# EAGLE board SWARMESH (EAGLE 9.2.0)
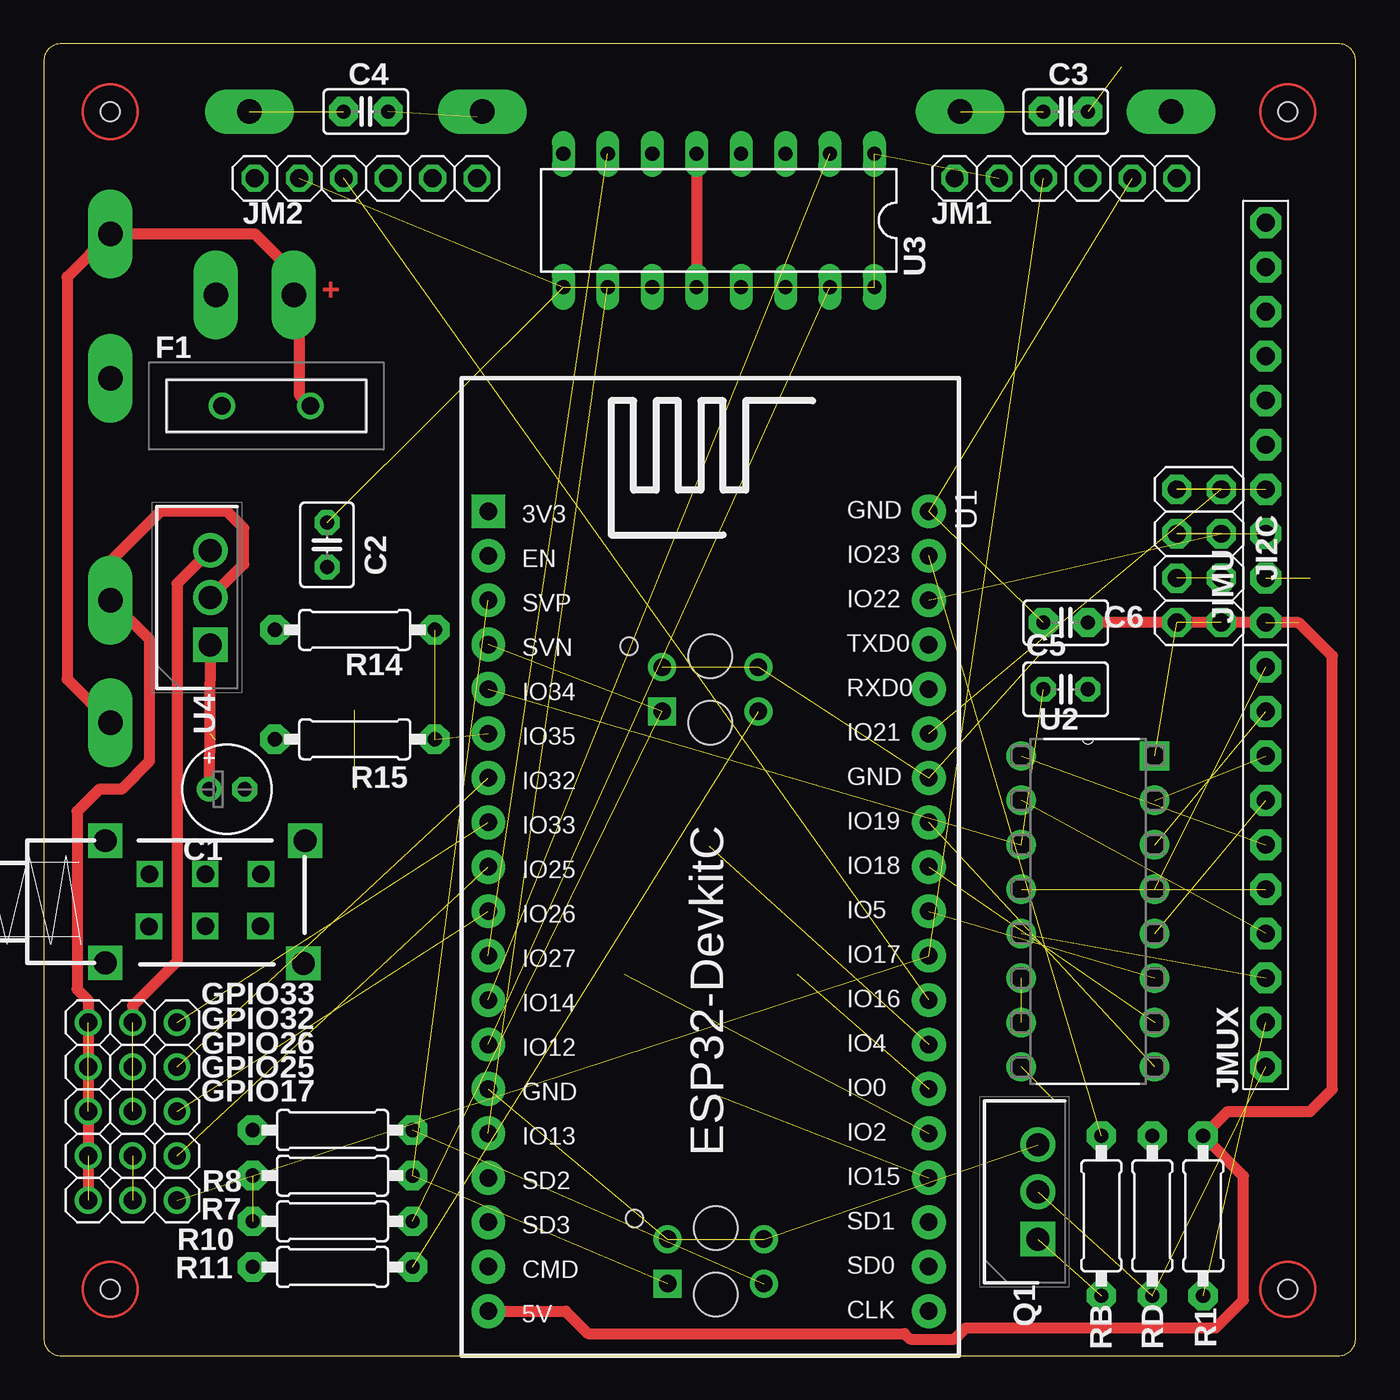
[diagram p0: board, top side]
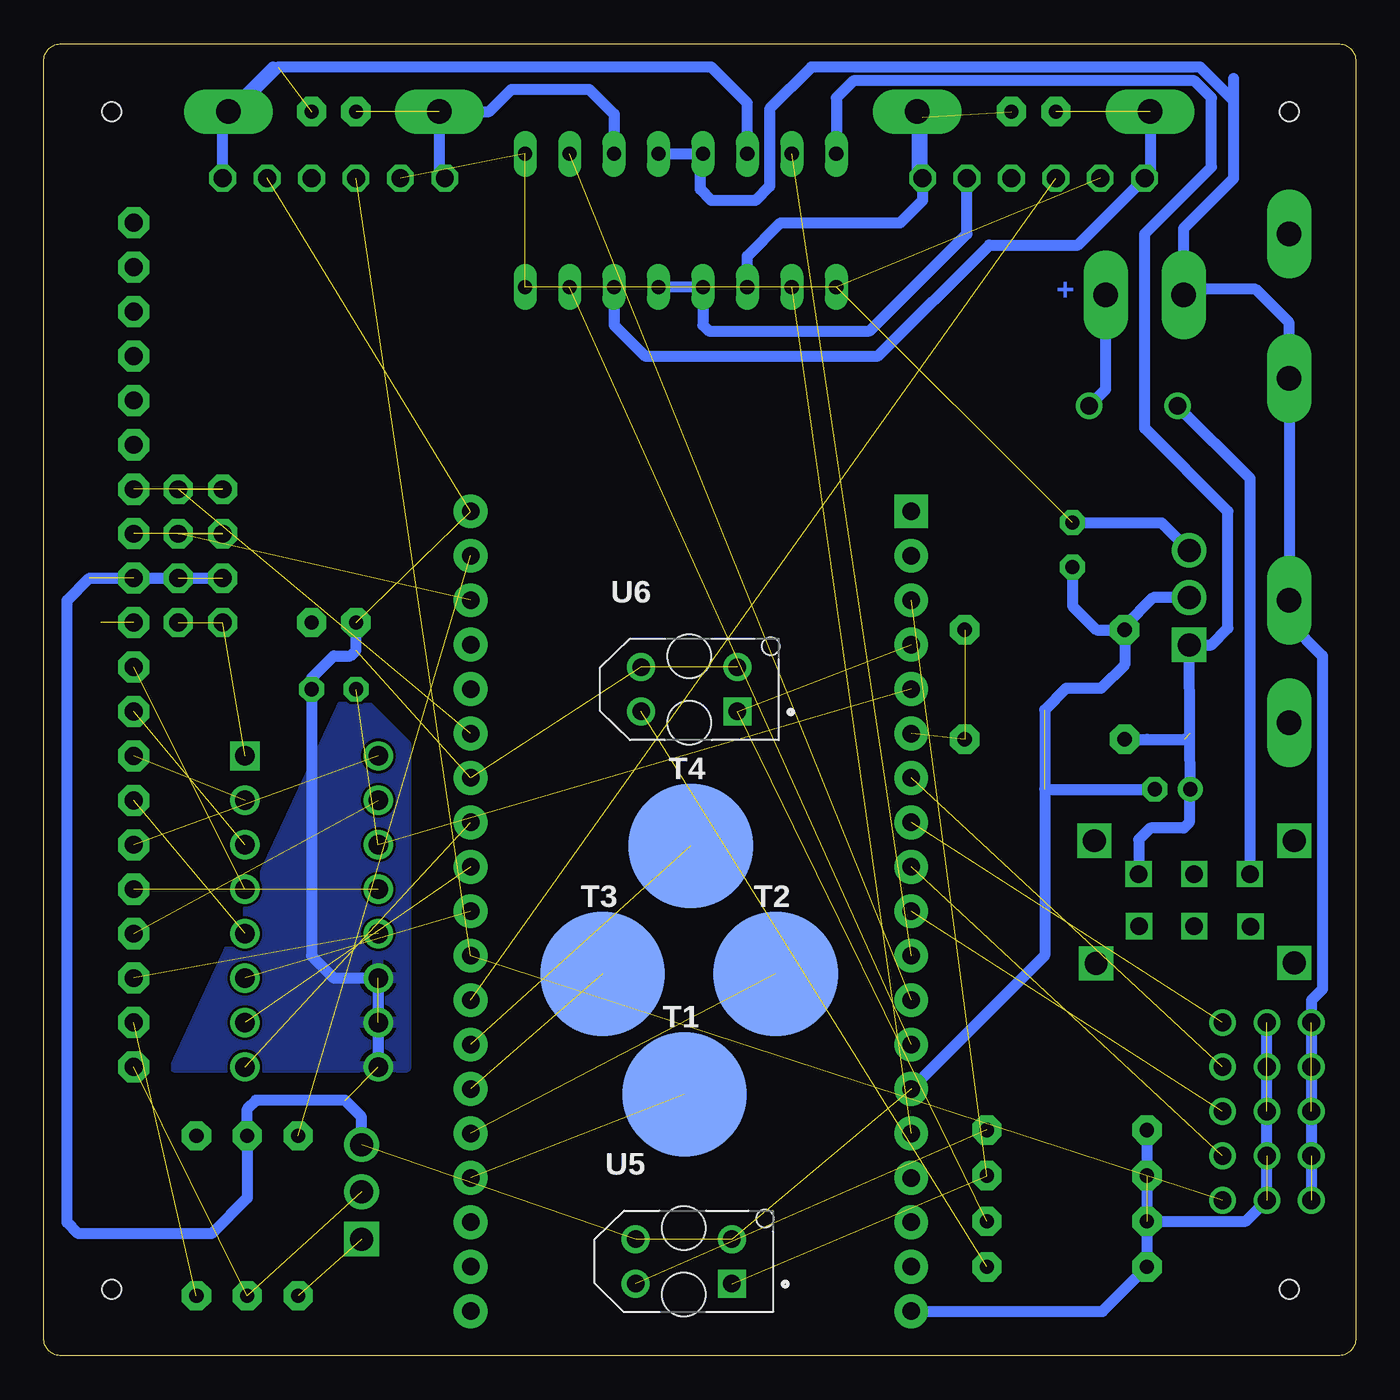
[diagram p1: board, bottom side, seen from below]

Size 75 x 75 mm. Coordinates in mm from the lower left corner, seen from the top.
Outline: 0,74 0,1 arc90 1,0 74,0 arc90 75,1 75,74 arc90 74,75 1,75 arc90 0,74
Copper layers (1*16): Top 0.035mm / dielectric 1.5mm / Bottom 0.035mm
Design rules "default *": minimum track width 6mil, minimum drill 0.35mm, track to track 6mil, track to pad 6mil, pad to pad 6mil, via to via 6mil, smd to smd 6mil, copper to edge 40mil, drill to drill 6mil, minimum pad ring 10mil, minimum via ring 8mil, stop-mask expansion 4mil, vias tented up to drill 0mil, thermal gap 10mil
Holes 1.1 mm at 3.81,3.81 3.81,71.12 71.12,71.12 71.12,3.81
tKeepout: area 0.9,0.9 to 6.7,6.7; area 68.3,1 to 74,6.6; area 0.9,68.2 to 6.7,74; area 68.2,68.2 to 74,74

## Footprints (pad centres in the part's own frame; a part is rotated, then mirrored left to right if it is on the bottom)
1X1-BIGPOGO = drill 1.4 pad 2.54 long: P$1 0,0
E2-5 = drill 0.813 pad 1.422: + -1.016,0 | drill 0.813 pad 1.422 octagon: - 1.016,0
C025-030X050 = drill 0.813 pad 1.422 octagon: 1 -1.27,0; 2 1.27,0
C025-025X050 = drill 0.813 pad 1.676 octagon: 1 -1.27,0; 2 1.27,0
RUEF300K2 = drill 1.01 pad 1.515: 1 0,0; 2 5.05,0
1X03 = drill 1.016: 1 -2.54,0; 2 0,0; 3 2.54,0
2X04 = drill 1.016 pad 1.676 octagon: 1 -3.81,-1.27; 2 -3.81,1.27; 3 -1.27,-1.27; 4 -1.27,1.27; 5 1.27,-1.27; 6 1.27,1.27; 7 3.81,-1.27; 8 3.81,1.27
1X10-BIG = drill 1.016 pad 1.778 octagon: 1 -11.43,0; 2 -8.89,0; 3 -6.35,0; 4 -3.81,0; 5 -1.27,0; 6 1.27,0; 7 3.81,0; 8 6.35,0; 9 8.89,0; 10 11.43,0
1X06 = drill 1.016 octagon: 1 -6.35,0; 2 -3.81,0; 3 -1.27,0; 4 1.27,0; 5 3.81,0; 6 6.35,0
TO270P460X1020X2008-3P = drill 1.32 pad 1.98 square: 1 0,0 | drill 1.32 pad 1.98: 2 2.7,0; 3 5.4,0
0207/9 = drill 0.813 pad 1.676 octagon: 1 -4.572,0; 2 4.572,0
PS22F03 = drill 1.3 square: 0 -3.175,5.715; 1 3.835,5.613; 2 3.81,-5.715; 3 -3.175,-5.715 | drill 1 square: C1 -1.27,0; C2 1.702,0; NC1 -1.27,-3.175; NC2 1.727,-3.226; NO1 -1.27,3.175; NO2 1.702,3.15
SPRING-CONNECTOR = smd 7.112 x 7.112: P$2 0,0
ESP32-DEVKITC = drill 1 pad 1.93 square: 1 -0.01,0.01 | drill 1 pad 1.93: 2 2.53,0.01; 3 5.07,0.01; 4 7.61,0.01; 5 10.15,0.01; 6 12.69,0.01; 7 15.23,0.01; 8 17.77,0.01; 9 20.31,0.01; 10 22.85,0.01; 11 25.39,0.01; 12 27.93,0.01; 13 30.47,0.01; 14 33.01,0.01; 15 35.55,0.01; 16 38.09,0.01; 17 40.63,0.01; 18 43.17,0.01; 19 45.71,0.01; 20 45.71,25.2; 21 43.17,25.2; 22 40.63,25.2; 23 38.09,25.2; 24 35.55,25.2; 25 33.01,25.2; 26 30.47,25.2; 27 27.93,25.2; 28 25.39,25.2; 29 22.85,25.2; 30 20.31,25.2; 31 17.77,25.2; 32 15.23,25.2; 33 12.69,25.2; 34 10.15,25.2; 35 7.61,25.2; 36 5.07,25.2; 37 2.53,25.2; 38 -0.01,25.2
CD4051BEE4DIP = drill 1.118: 1 -3.81,8.89; 2 -3.81,6.35; 3 -3.81,3.81; 4 -3.81,1.27; 5 -3.81,-1.27; 6 -3.81,-3.81; 7 -3.81,-6.35; 8 -3.81,-8.89; 9 3.81,-8.89; 10 3.81,-6.35; 11 3.81,-3.81; 12 3.81,-1.27; 13 3.81,1.27; 14 3.81,3.81; 15 3.81,6.35 | drill 1.118 square: 16 3.81,8.89
DIL16 = drill 0.813 long: 1 -8.89,-3.81; 2 -6.35,-3.81; 3 -3.81,-3.81; 4 -1.27,-3.81; 5 1.27,-3.81; 6 3.81,-3.81; 7 6.35,-3.81; 8 8.89,-3.81; 9 8.89,3.81; 10 6.35,3.81; 11 3.81,3.81; 12 1.27,3.81; 13 -1.27,3.81; 14 -3.81,3.81; 15 -6.35,3.81; 16 -8.89,3.81
XDCR_TCRT5000L = drill 1 pad 1.6 square: 1 -2.75,1.27 | drill 1 pad 1.6: 2 -2.75,-1.27; 3 2.75,-1.27; 4 2.75,1.27 | hole 2.5: 0,1.9; 0,-1.9 | hole 1: -4.65,-2.45

## Placement (x,y rotation side)
BAT+  [1X1-BIGPOGO]  3.81,64.14 90 top
BAT-  [1X1-BIGPOGO]  9.84,60.64 90 top
C1  10uF  [E2-5]  10.48,32.38 0 top
C2  [C025-030X050]  16.19,46.35 270 top
C3  [C025-025X050]  58.42,71.12 0 top
C4  [C025-025X050]  18.41,71.12 0 top
C5  [C025-030X050]  58.42,38.1 0 top
C6  [C025-025X050]  58.42,41.91 180 top
CHG1+  [1X1-BIGPOGO]  3.81,36.2 270 top
CHG1-  [1X1-BIGPOGO]  3.81,43.18 270 top
CHG2+  [1X1-BIGPOGO]  14.29,60.64 270 bottom
CHG2-  [1X1-BIGPOGO]  3.81,55.88 270 top
F1  RUEF300K-2  [RUEF300K2]  15.24,54.29 180 top
GPIO17  [1X03]  5.08,8.89 180 top
GPIO25  [1X03]  5.08,11.43 180 top
GPIO26  [1X03]  5.08,13.97 180 top
GPIO32  [1X03]  5.08,16.51 180 top
GPIO33  [1X03]  5.08,19.05 180 top
JI2C  [2X04]  66.04,45.72 90 top
JIMU  PINHD-1X10  [1X10-BIG]  69.85,53.34 90 top
JM1  [1X06]  58.42,67.31 0 top
JM2  [1X06]  18.41,67.31 0 top
JMUX  PINHD-1X10  [1X10-BIG]  69.85,27.94 270 top
JP1  [1X1-BIGPOGO]  52.39,71.12 180 top
JP2  [1X1-BIGPOGO]  64.45,71.12 180 top
JP3  [1X1-BIGPOGO]  25.08,71.12 0 top
JP4  [1X1-BIGPOGO]  11.75,71.12 180 top
Q1  TIP122  [TO270P460X1020X2008-3P]  56.83,6.67 90 top
R1  220  [0207/9]  66.28,8 90 top
R7  1k  [0207/9]  16.51,10.3 0 top
R8  100  [0207/9]  16.51,12.9 180 top
R10  1k  [0207/9]  16.51,7.69 0 top
R11  100  [0207/9]  16.51,5.08 180 top
R14  10k  [0207/9]  17.78,41.5 0 top
R15  47k  [0207/9]  17.78,35.24 180 top
RB  1k  [0207/9]  60.46,8 90 top
RD  0  [0207/9]  63.37,8 90 top
S1  [PS22F03]  9.23,26.27 270 top
T1  [SPRING-CONNECTOR]  38.36,14.95 0 bottom
T2  [SPRING-CONNECTOR]  33.16,21.83 0 bottom
T3  [SPRING-CONNECTOR]  43.05,21.83 0 bottom
T4  [SPRING-CONNECTOR]  38.02,29.14 0 bottom
U1  ESP32DEVKITC  [ESP32-DEVKITC]  25.4,48.26 270 top
U2  CD4051BEE4  [CD4051BEE4DIP]  59.69,25.4 0 top
U3  L293D  [DIL16]  38.59,64.9 180 top
U4  L7805CV-DG  [TO270P460X1020X2008-3P]  9.53,40.64 90 top
U5  TCRT5000L  [XDCR_TCRT5000L]  38.42,5.4 180 bottom
U6  TCRT5000L  [XDCR_TCRT5000L]  38.1,38.1 180 bottom

## Library data of the parts
BAT+ BAT- C1-C6 CHG1+ CHG1- CHG2+ CHG2- GPIO17 GPIO25 GPIO26 GPIO32 GPIO33 JI2C JIMU JM1 JM2 JMUX JP1-JP4 R1 R7 R8 R10 R11 R14 R15 RB RD = adafruit
F1 = RUEF300K-2; DESCRIPTION: TE CONNECTIVITY / RAYCHEM - RUEF300K-2 - RESETTABLE FUSE, PTC, 30V, 3A, RADIAL; HEIGHT: 16.5mm; MANUFACTURER_NAME: TE CONNECTIVITY / RAYCHEM; MANUFACTURER_PART_NUMBER: RUEF300K-2
Q1 = TIP122; DESCRIPTION: TIP122, Darlington Transistor, NPN 8 A 100 V HFE:1000, 3-Pin, TO-220; HEIGHT: 4.6mm; MANUFACTURER_NAME: STMicroelectronics; MANUFACTURER_PART_NUMBER: TIP122; MOUSER_PART_NUMBER: 511-TIP122; MOUSER_PRICE-STOCK: https://www.mouser.com/Search/Refine.aspx?Keyword=511-TIP122
S1 = ArduinoNano LearningBot 4-21-18
T1-T4 = SparkFun-Connectors; SF_ID: PRT-11822
U1 = ESP32-DEVKITC (1)
U2 = CD4051BEE4
U3 = st-microelectronics; MPN: L293D; OC_FARNELL: 9589619; OC_NEWARK: 56P8249
U4 = L7805CV-DG; ALLIED_NUMBER: 70390055; ALLIED_PRICE-STOCK: http://www.alliedelec.com/stmicroelectronics-l7805cv-dg/70390055/; DESCRIPTION: Voltage Regulator 5V 4% 1.5A TO220 L7805CV-DG, Linear Voltage Regulator, Current Limit, Shut-Down 1.5A 5 V, 3-Pin TO220; HEIGHT: 4.6mm; MANUFACTURER_NAME: STMicroelectronics; MANUFACTURER_PART_NUMBER: L7805CV-DG; MOUSER_PART_NUMBER: 511-L7805CV-DG; MOUSER_PRICE-STOCK: https://www.mouser.com/Search/Refine.aspx?Keyword=511-L7805CV-DG; RS_PART_NUMBER: 7931346P; RS_PRICE-STOCK: http://uk.rs-online.com/web/p/products/7931346P
U5 U6 = TCRT5000L; AVAILABILITY: Unavailable; DESCRIPTION: TCRT5000 Series 940 nm 100 mA 60 mA Transistor Output Reflective Optical Sensor; MF: Vishay Semiconductor; MP: TCRT5000L; PACKAGE: PCB Mount Vishay; PRICE: None

## Nets
ADCMX: C5.1 U1.5 U2.3
ADO: JIMU.7
BATLVL: R14.2 R15.1 U1.6
E1A: GPIO17.1 JM1.3 U1.28
E1B: JM1.4
E2A: JM2.3 U1.27
E2B: JM2.4
ECL: JIMU.6
EDA: JIMU.5
FSY: JIMU.10
GND: BAT-.P$1 C1.- C2.2 C5.2 C6.2 CHG1-.P$1 CHG2-.P$1 GPIO17.3 GPIO25.3 GPIO26.3 GPIO32.3 GPIO33.3 JI2C.3 JI2C.4 JIMU.2 JM1.5 JM2.5 Q1.3 R14.1 RD.2 U1.14 U1.32 U1.38 U2.6 U2.7 U2.8 U3.4 U3.5 U3.12 U3.13 U4.2 U5.2 U5.3 U6.2 U6.3
INT: JIMU.8
IO5: U1.29 U2.11
IO12: U1.13 U3.15
IO13: U1.15 U3.10
IO14: U1.12 U3.2
IO25: GPIO25.1 U1.9
IO26: GPIO26.1 U1.10
IO27: U1.11 U3.7
IO32: GPIO32.1 U1.7
IO33: GPIO33.1 U1.8
IR1: R7.2 U1.3 U5.1
IR2: R10.2 U1.4 U6.1
IRTX: RB.2 U1.37
M1A: C3.1 JM1.1 JP1.P$1 U3.3
M1B: C3.2 JM1.6 JP2.P$1 U3.6
M2A: C4.1 JM2.1 JP4.P$1 U3.14
M2B: C4.2 JM2.6 JP3.P$1 U3.11
N$1: Q1.1 RB.1
N$5: JMUX.6 U2.4
N$7: U1.30 U2.10
N$8: U1.31 U2.9
N$9: R11.1 U6.4
N$10: R8.1 U5.4
N$11: JMUX.5 U2.1
N$13: JMUX.7 U2.2
N$14: JMUX.8 U2.5
N$15: BAT+.P$1 CHG1+.P$1 CHG2+.P$1 F1.1
N$16: JMUX.9 R1.1
N$17: JMUX.10 Q1.2 RD.1
N$18: F1.2 S1.NC1
N$19: JMUX.1 U2.13
N$20: JMUX.2 U2.14
N$21: JMUX.4 U2.12
N$22: JMUX.3 U2.15
NCS: JIMU.9
SCL: JI2C.5 JI2C.6 JIMU.3 U1.36
SDA: JI2C.7 JI2C.8 JIMU.4 U1.33
TOUCH1: T1.P$2 U1.23
TOUCH2: T2.P$2 U1.24
TOUCH3: T3.P$2 U1.25
TOUCH4: T4.P$2 U1.26
V+: C1.+ R15.2 S1.NO1 U3.8 U4.1
VCC: C2.1 C6.1 GPIO17.2 GPIO25.2 GPIO26.2 GPIO32.2 GPIO33.2 JI2C.1 JI2C.2 JIMU.1 JM1.2 JM2.2 R1.2 R7.1 R8.2 R10.1 R11.2 U1.19 U2.16 U3.1 U3.9 U3.16 U4.3

## Tracks (layer width: path | path; a pad name or v marks a point on that pad's centre or on a via)
ADCMX  (2 unrouted)
BATLVL  (2 unrouted)
E1A  (2 unrouted)
E2A  (1 unrouted)
GND  (16 unrouted)
  Top 0.635: U3.5 U3.12 | U4.2 11.43,45.24 11.43,47.31 10.48,48.26 6.67,48.26 3.81,45.4 CHG1-.P$1 6.03,40.96 6.03,33.97 4.45,32.38 3.17,32.38 1.91,31.11 1.91,20.95 2.54,20.32 GPIO17.3
  Bottom 0.635: Q1.3 56.83,13.65 57.78,14.61 62.87,14.61 63.37,14.1 RD.2 63.37,9.02 65.41,6.99 73.03,6.99 73.66,7.62 73.66,43.18 72.39,44.45 JI2C.4 | U1.14 17.78,22.88 17.78,36.92 16.56,38.15 14.56,38.15 13.21,39.5 R14.1 | 17.78,32.38 C1.- | GPIO17.3 GPIO33.3 2.54,20.32 1.91,20.95 1.91,40.01 3.81,41.91 CHG1-.P$1 CHG2-.P$1 3.81,59.05 5.71,60.96 9.53,60.96 BAT-.P$1 9.84,64.45 6.99,67.31 6.99,71.75 | U3.4 37.47,68.71 | 37.47,68.71 U3.5 | U3.13 U3.12 37.32,58.91 36.98,58.57 27.79,58.57 22.23,64.14 JM2.5 | U4.2 11.59,43.34 13.21,41.72 R14.1 | C2.2 16.19,42.86 14.83,41.5 R14.1 | 6.99,71.75 6.99,73.03 | 6.99,71.75 8.89,73.66 31.11,73.66 33.5,71.27 33.5,66.85 34.31,66.04 36.83,66.04 37.47,66.67 37.47,68.71 | U2.8 U2.6 58.42,21.59 59.69,22.86 C5.2 59.69,38.73 58.42,40.01 57.47,40.01 57.15,40.32 C6.2
  pour Bottom: 57.48,38.11 67.49,16.51 54.29,16.51 54.29,34.92
IO5  (1 unrouted)
IO12  (1 unrouted)
IO13  (1 unrouted)
IO14  (1 unrouted)
IO25  (1 unrouted)
IO26  (1 unrouted)
IO27  (1 unrouted)
IO32  (1 unrouted)
IO33  (1 unrouted)
IR1  (2 unrouted)
IR2  (2 unrouted)
IRTX  (1 unrouted)
M1A  (1 unrouted)
  Bottom 0.635: JM1.1 52.39,67.63 JP1.P$1 49.53,71.12 48.26,72.39 43.81,72.39 42.4,70.97 U3.3
M1B  (1 unrouted)
  Bottom 0.635: 64.77,70.8 JP2.P$1 61.91,73.66 61.59,73.66 | U3.6 34.78,71.61 36.83,73.66 61.59,73.66 | 61.59,73.66 64.45,70.8 64.77,70.8 | JM1.6 64.77,70.8
M2A  (1 unrouted)
  Bottom 0.635: JP4.P$1 11.75,67.63 JM2.1 15.88,63.5 20.95,63.5 27.3,57.15 40.64,57.15 42.4,58.91 U3.14
M2B  (1 unrouted)
  Bottom 0.635: JM2.6 25.08,67.63 JP3.P$1 24.77,70.8 JM2.6 | U3.11 34.78,62.87 32.88,64.77 26.04,64.77 24.77,66.04 JM2.6
N$1  (1 unrouted)
N$5  (1 unrouted)
N$7  (1 unrouted)
N$8  (1 unrouted)
N$9  (1 unrouted)
N$10  (1 unrouted)
N$11  (1 unrouted)
N$13  (1 unrouted)
N$14  (1 unrouted)
N$15
  Top 0.635: F1.1 14.61,54.93 14.61,61.59 12.06,64.14 BAT+.P$1 1.33,61.66 1.33,38.67 CHG1+.P$1
  Bottom 0.635: F1.1 14.29,55.24 CHG2+.P$1 | BAT+.P$1 4.45,64.14
N$16  (1 unrouted)
N$17  (2 unrouted)
N$18
  Bottom 0.635: F1.2 6.05,50.16 S1.NC1
N$19  (1 unrouted)
N$20  (1 unrouted)
N$21  (1 unrouted)
N$22  (1 unrouted)
SCL  (3 unrouted)
SDA  (3 unrouted)
TOUCH1  (1 unrouted)
TOUCH2  (1 unrouted)
TOUCH3  (1 unrouted)
TOUCH4  (1 unrouted)
V+  (1 unrouted)
  Top 0.635: U4.1 C1.+
  Bottom 0.635: 29.84,67.94 29.84,68.56 U3.8 29.7,71.9 28.73,72.87 9.22,72.87 8.26,71.91 8.26,67.94 12.06,64.14 12.06,53.02 7.3,48.26 7.3,41.59 8.26,40.64 U4.1 9.49,35.56 C1.+ 9.53,32.32 9.53,30.48 9.84,30.16 11.75,30.16 12.4,29.5 S1.NO1 | 11.94,35.24 R15.2 9.8,35.24
VCC  (12 unrouted)
  Top 0.635: U4.3 7.62,44.13 7.62,22.54 5.08,20 GPIO33.2 | U1.19 29.84,2.55 31.11,1.27 49.21,1.27 49.53,0.95 52.07,0.95 52.7,1.59 66.99,1.59 68.58,3.17 68.58,10.27 R1.2 67.67,13.97 72.39,13.97 73.66,15.24 73.66,40.01 71.75,41.91 JI2C.2 C6.1
  Bottom 0.635: C2.1 11.11,47.62 U4.3 | GPIO33.2 GPIO17.2 6.28,7.69 R10.1 | R8.2 R7.1 R11.2 14.48,2.54 U1.19
(copper drawn outside any net)
  shapes: Top circle x4

## Text on the board
Top: +
Bottom: +
Document: NYU Shanghai / Swarm Robotics / / Zander Mao / Sheldon Chen / Alison Yao / Thomas Yee / James Wu / Benny Yang / Rodolfo Cossovich / / 2019/06/25 | Licensing: Creative Commons ShareAlike 4.0 International - https://creativecommons.org/licenses/by-sa/4.0/ / You are welcome to use this library for commercial purposes. For attribution, we ask that when you reproduce our board, you email us with a link. / Acknowlewdgement: This project has been supported by NYU Shanghai Dean's Undergraduate Research Fund. | This IR reflective sensor should be standing in the front of the robot so we use it to detect obstacles. | Notes: tip122 and 7805 have no component body. / designators have different font size and are not aligned. / Switch designator missing. It seems that many footprints overlap silkscreen to solder pads. / Pin 1 should be indicated in any connector. Touch pads are too big and could have a hole to solder a cable. / Positive and negative pads for battery look the same (they should have slikscreen marks and different shape) / confirm if we can pass through holes of TCRT5000 / S1 has the wrong footprint (it's the middle contact the one that connects / battery pads can be moved around for better ground | Zander's update: / Changed TIP122&L7805CV footprint / Changed resister to PTH / Romain's Suggestions: leave the ground pin first, use ground plane to connect them later